# Altium PCB PCB_Dres.PcbDoc
Units mm, origin at the board's own origin, x right, y up, seen from the top; angles counter-clockwise.
Board outline 44.1 x 41.7 mm, 2 copper layers (Top Layer, Bottom Layer), stack 1.671 mm thick; 26 components, 19 nets, 148 pads, 49 vias.
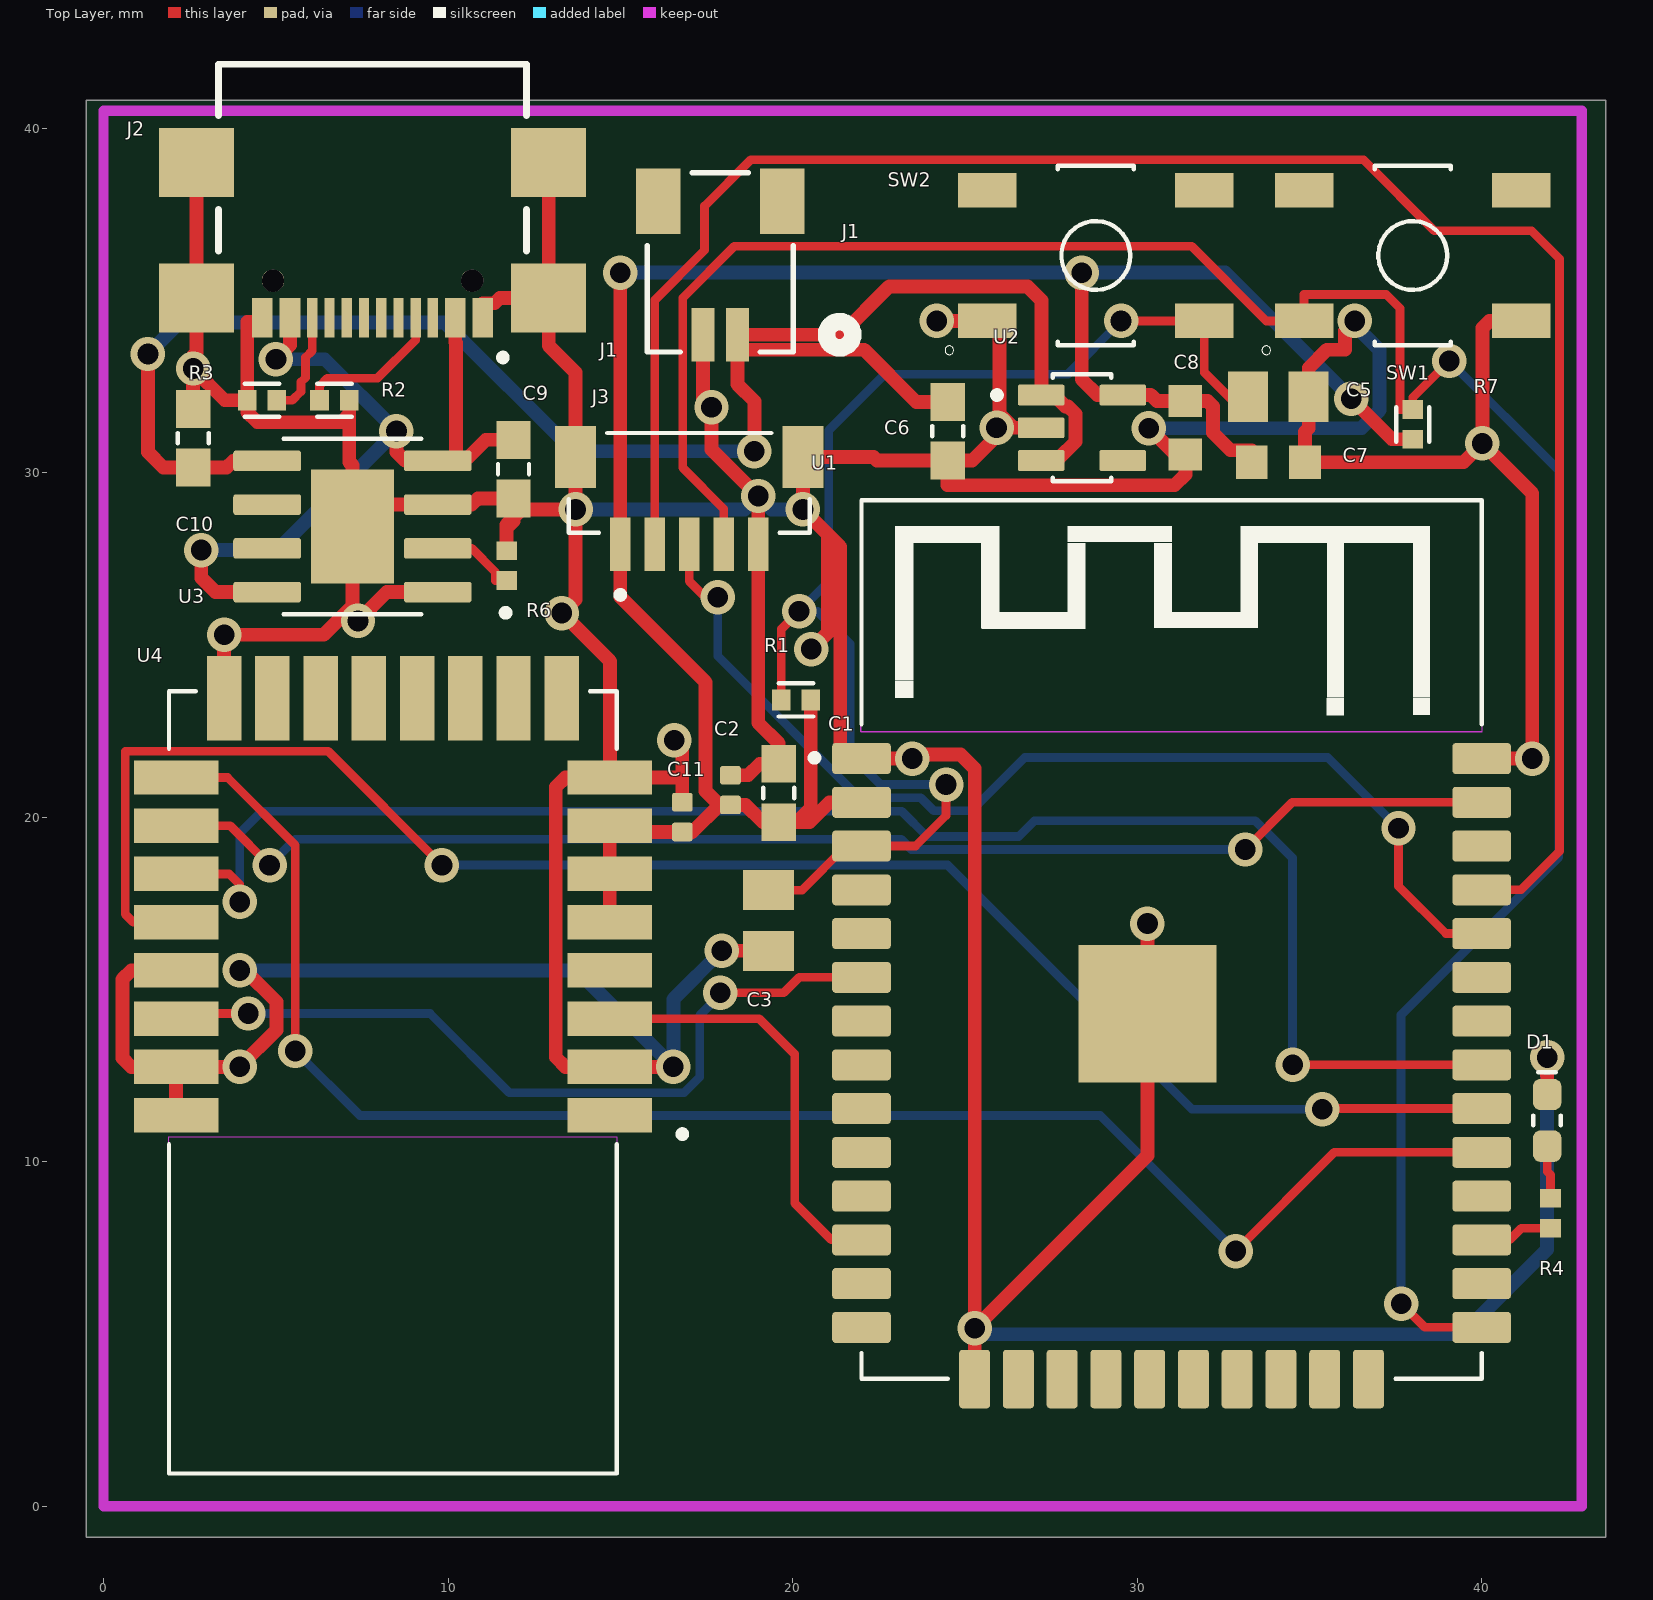
[diagram p0: Top Layer view]
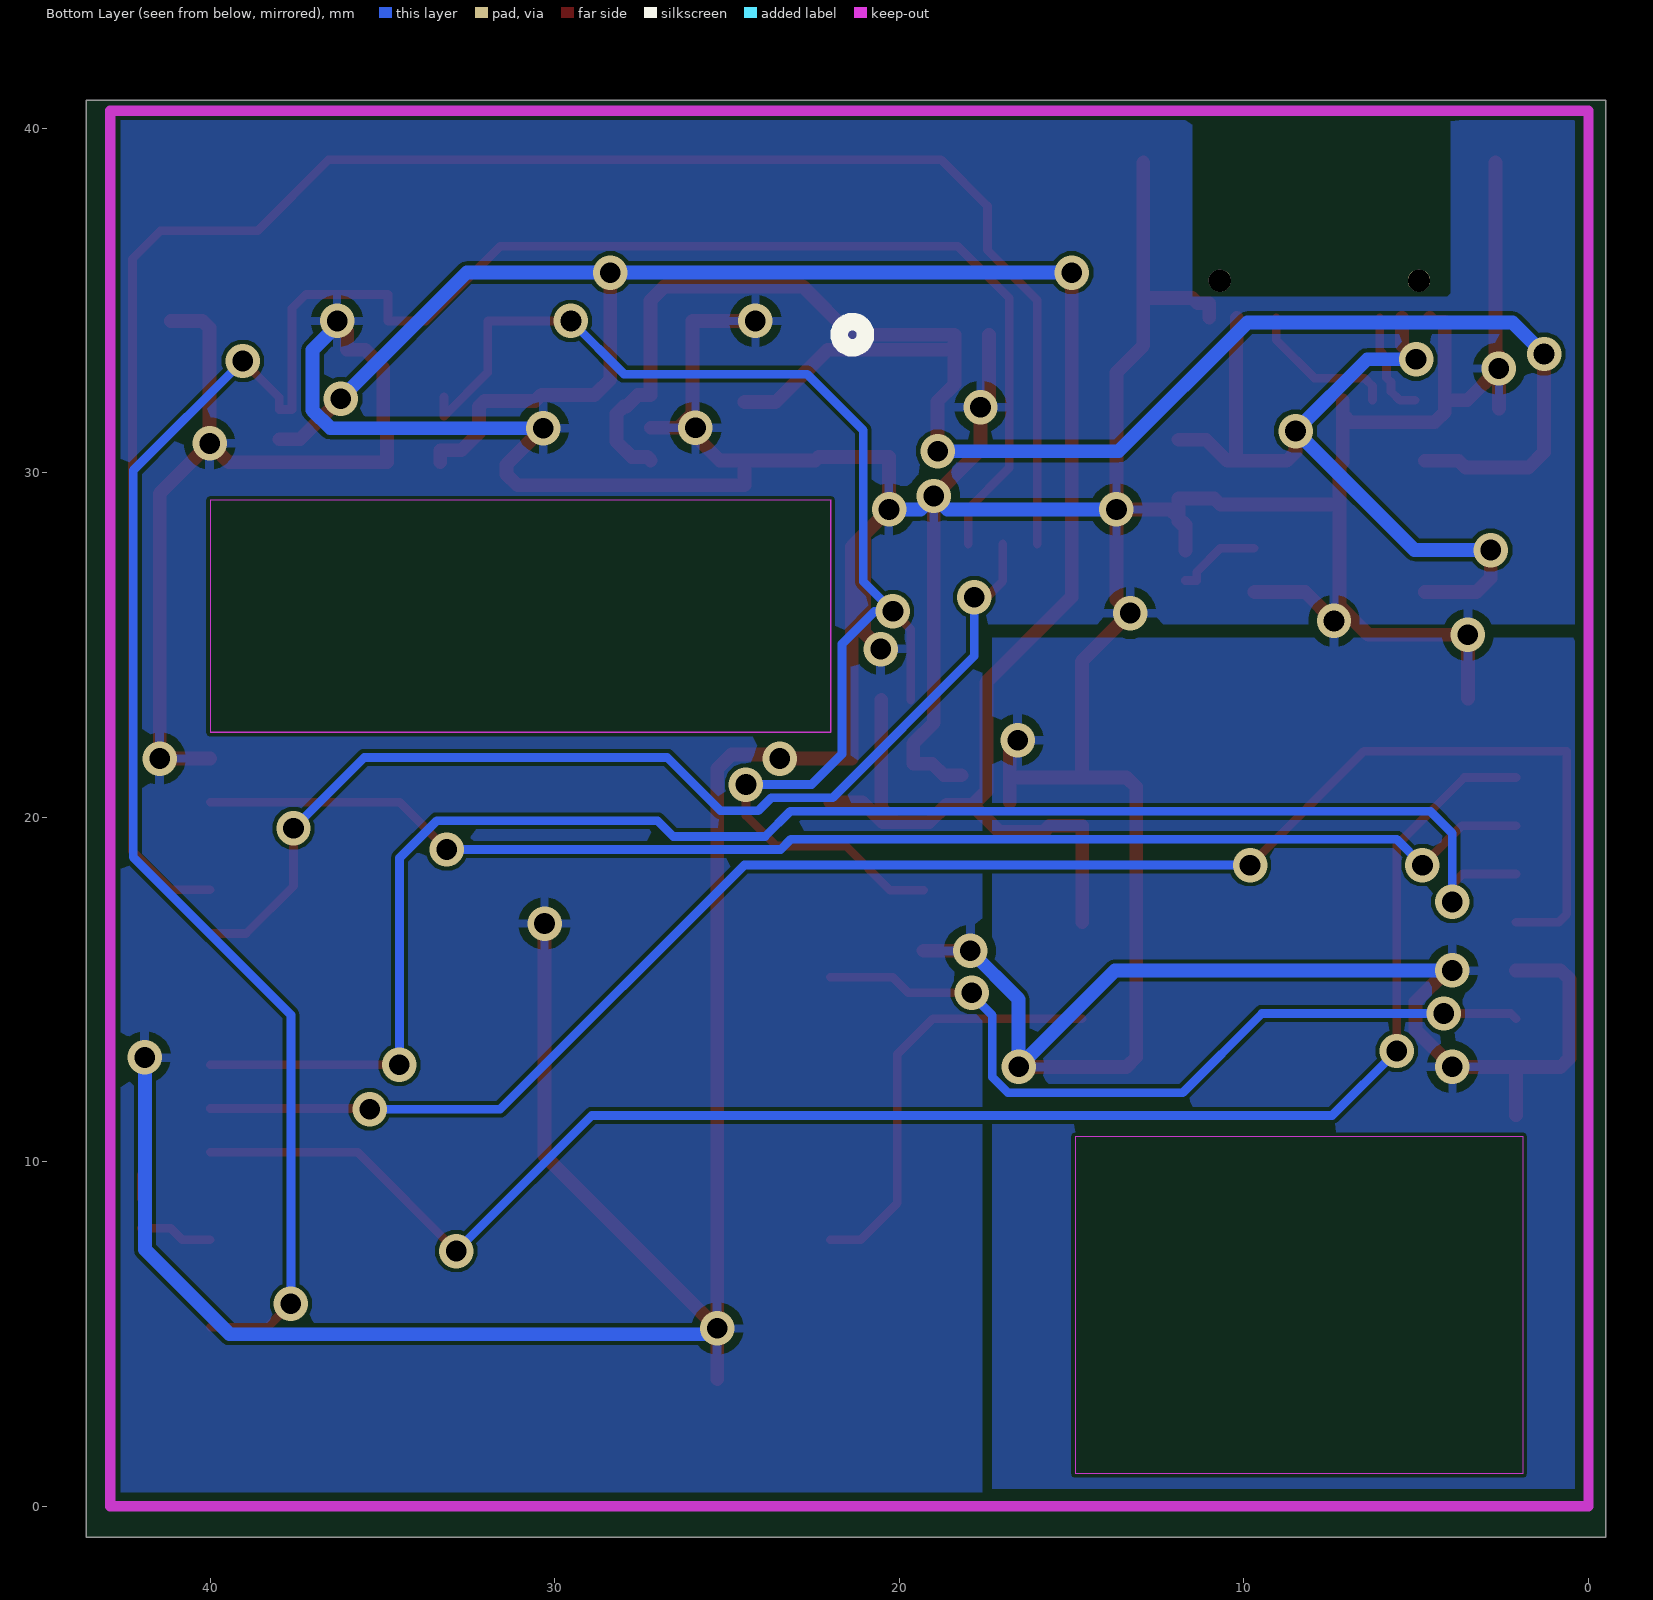
[diagram p1: Bottom Layer view, seen from below]
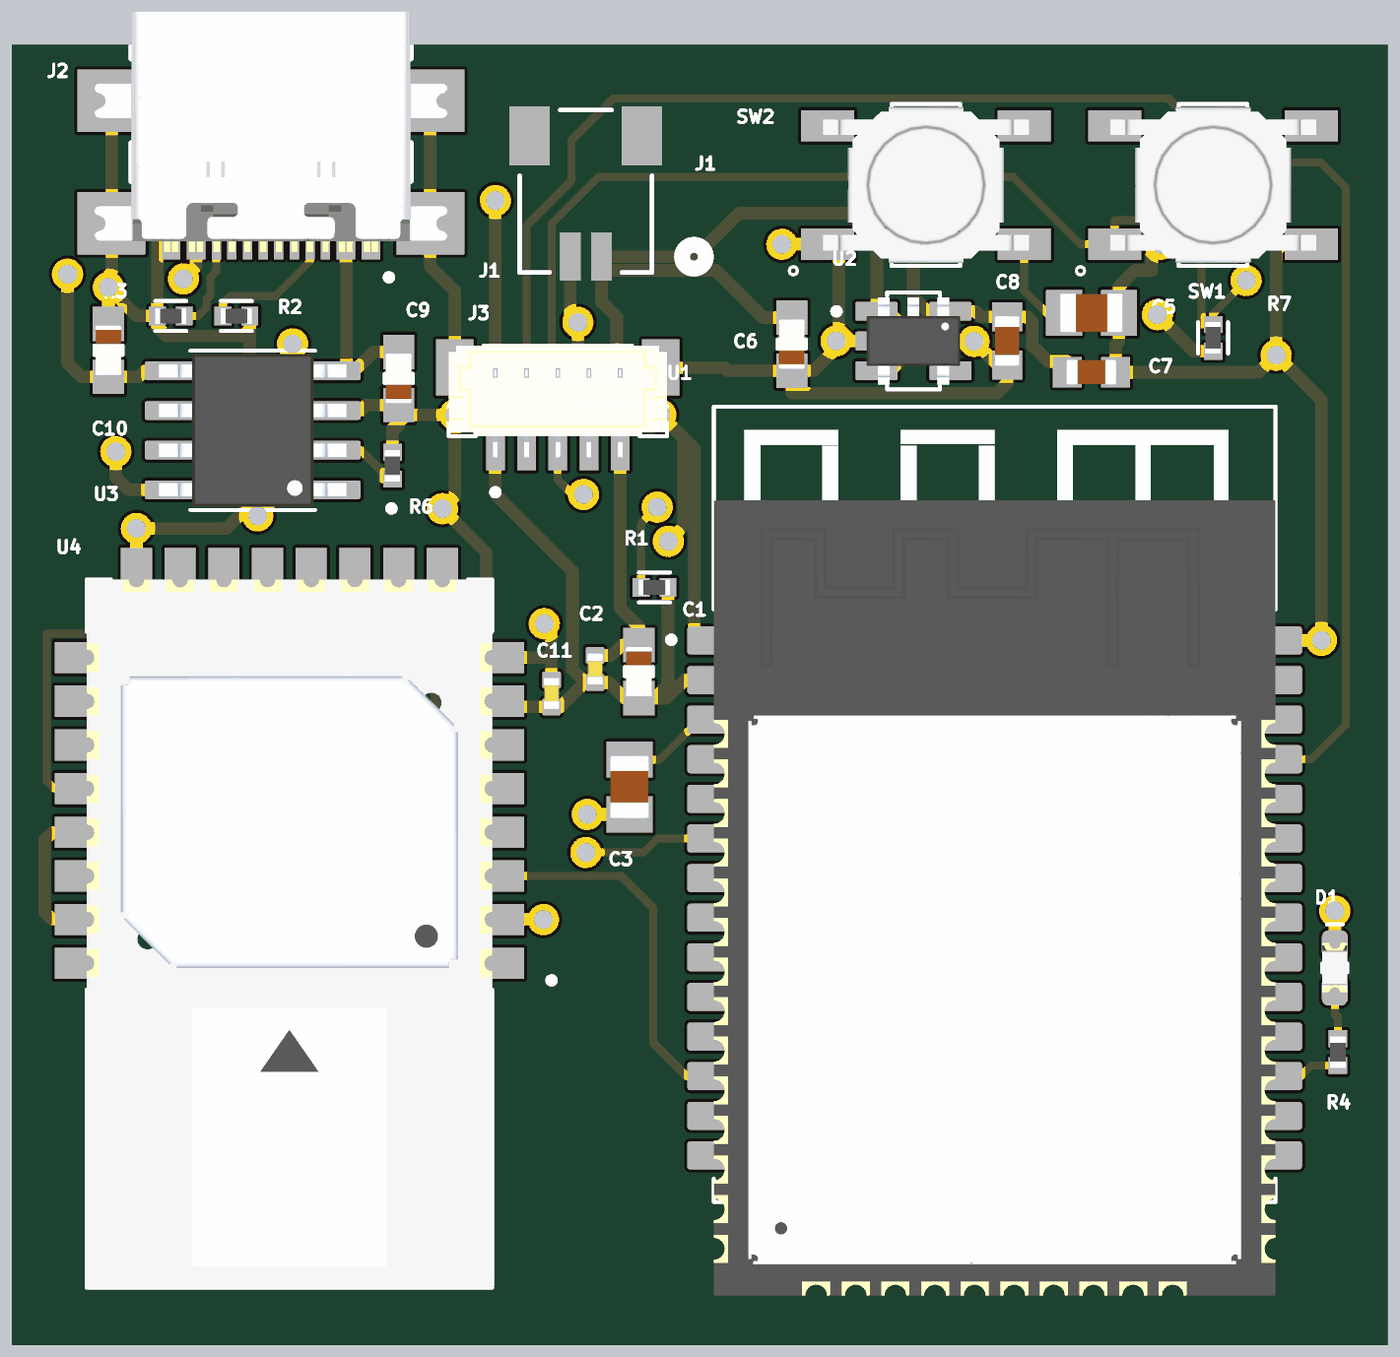
[diagram p2: 3D render of the assembled board from above, using the file's embedded part models]

## Layer stack, top to bottom
Top Solder: solder mask 0.0102, Solder Resist, Dk 3.5
Top Layer: signal copper 0.0356
Dielectric1: core 1.6, FR-4, Dk 4.8
Bottom Layer: signal copper 0.0356
Bottom Solder: solder mask 0.0102, Solder Resist, Dk 3.5

## Board outline
-0.5,-0.9 43.6,-0.9 43.6,40.8 -0.5,40.8

## Design rules (kind name [scope] priority, off if disabled: settings)
BoardOutlineClearance [All] p1: gap=0.12 ignorepadtopadclearanceinfootprint=FALSE except(0: Arc-SplitContinuation Track-SplitContinuation SMDPad-SplitContinuation THPad-SplitContinuation Via-SplitContinuation Fill-SplitContinuation Poly-SplitContinuation Region-SplitContinuation Text-SplitContinuation)
Clearance [All] p1: gap=0.12 ignorepadtopadclearanceinfootprint=FALSE except(0: Arc-Hole Track-Hole SMDPad-Hole THPad-Hole Via-Hole Fill-Hole Poly-Hole Region-Hole Text-Hole)
DiffPairsRouting DiffPair_USB_DATADiffPairsRouting [InDifferentialPairClass('USB_DATA')] p1: maxlimit=0.254 minlimit=0.254 mostfreqgap=0.254 toplayer_minwidth=0.381 toplayer_maxwidth=1.27 toplayer_prefwidth=1.27 bottomlayer_minwidth=0.381 bottomlayer_maxwidth=1.27 bottomlayer_prefwidth=1.27 maxuncoupledlength=12.7
DiffPairsRouting [All] p2: maxlimit=0.254 minlimit=0.254 mostfreqgap=0.254 toplayer_minwidth=0.381 toplayer_maxwidth=0.381 toplayer_prefwidth=0.381 bottomlayer_minwidth=0.381 bottomlayer_maxwidth=0.381 bottomlayer_prefwidth=0.381 maxuncoupledlength=12.7
HoleSize HoleSize_1 [InPadClass('Mounting_Holes')] p1: absolutevalues=TRUE maxlimit=3 minlimit=0.025 maxpercent=80.000 minpercent=20.000
HoleSize Mounting_Holes [All] p2: absolutevalues=TRUE maxlimit=2.54 minlimit=0.025 maxpercent=80.000 minpercent=20.000
MatchedLengths DiffPair_USB_DATAMatchedLengths [InDifferentialPairClass('USB_DATA')] p1: tolerance=3.048 checknetsindiffpair=TRUE checkdiffpairvsdiffpair=FALSE checkxsignals=FALSE checkothers=FALSE
MinimumSolderMaskSliver [All] p1: minsoldermaskwidth=0
PolygonConnect [All] p1: connectstyle=Relief reliefconductorwidth=0.254 reliefentries=4 polygonreliefangle="90 Angle" airgapwidth=0.254
RoomDefinition U_ESP32_Module [InComponentClass('U_ESP32_Module')] p1: confinementstyle=ConfineIn formatcopy=TRUE lockcomponents=FALSE outline 0.092,42.325 0.3,25.5 17.5,25.5 17.5,0.3 42.7,0.3 42.7,42.476
RoomDefinition U_DWM3000 [InComponentClass('U_DWM3000')] p2: confinementstyle=ConfineIn formatcopy=TRUE lockcomponents=FALSE outline 0.3,0.4 17.4,0.4 17.4,25.3 0.3,25.3
RoutingVias [All] p1: holewidth=0.6 width=1 viastyle="Through Hole" minholewidth=0.6 minwidth=1 maxholewidth=0.711 maxwidth=1.27
ShortCircuit ShortCircuit_ADG [InNet('AGND') vs InNet('DGND')] p1 off: allowed=TRUE
ShortCircuit [All] p2: allowed=FALSE
SilkToSolderMaskClearance SilkscreenOverComponentPads [IsPad] p1 off: minsilkscreentomaskgap=0.254 clearancetoexposedcopper=TRUE
SolderMaskExpansion [All] p1: expansion=0.102 istentingtop=FALSE
SupplyNets "Schematic Supply Nets_3" [InNet('+3.3V')] p1: voltage=0.000
SupplyNets "Schematic Supply Nets_1" [InNet('GND')] p2: voltage=0.000
Width Width_Power [InNetClass('Power')] p1: maxlimit=0.6 minlimit=0.3 preferedwidth=0.4 minimp=50.000000 maximp=50.000000 favimp=50.000000
Width [All] p2: maxlimit=0.254 minlimit=0.254 preferedwidth=0.254
25 further rules are at their usual default settings.

## Classes and differential pairs
net class Power: +3.3V GND V_BAT V_USB
component class U_ESP32_Module: C1 C2 C3 C5 C6 C7 C8 C9 C10 D1 J1 J2 J3 R1 R2 R3 R4 R6 R7 SW1 SW2 U1 U2 U3
component class U_DWM3000: C11 U4

## Components (designator, comment, footprint, x,y, rotation, side; value= is the part's Value field where it differs from the comment)
C1 "Cap" CAPC1608X90 19.6,20.7 r270 top value=10uF
C2 "Cap" CAPC1005X55N 18.197,20.785 r270 top value=100nF
C3 "Cap" CAPC2012X94N 19.3,17 r90 top value=0.1uF/50V(10%)
C5 "Cap" CAPC2012X94N 34.1,32.2 r180 top value=0.1uF/50V(10%)
C6 "Cap" CAPC1608X90 24.5,31.2 r90 top value=10uF
C7 "Cap" CAPC1608X87N 34.1,30.3 r180 top value=10nF
C8 "Cap" CAPC1608X87N 31.4,31.3 r90 top value=10nF
C9 "Cap" CAPC1608X90 11.9,30.1 r90 top value=10uF
C10 "Cap" CAPC1608X90 2.6,31 r270 top value=10uF
C11 "Cap" CAPC1005X55N 16.8,20 r270 top value=0.1uF
D1 "597-3326-607F" LEDSC160X80X70L45N 41.9,11.2 r270 top
J1 "SM02B-SRSS-TB (LF)(SN)" CONN_SM02B-SRSS-TB_JST 17.9,36.1 r0 top
J2 "USB4110GFA" GCT_USB4110GFA 7.81,35.57 r180 top
J3 "BM05B-SRSS-TB(LF)(SN)" JST_BM05B-SRSS-TB(LF)(SN) 17,29.7 r0 top
R1 "Res1" RESC1005X40 20.1,23.4 r0 top value="10k (5%)"
R2 "Res1" RESC1005X40 6.7,32.1 r180 top value=5.1k
R3 "Res1" RESC1005X40 4.6,32.1 r180 top value=5.1k
R4 "Res1" RESC1005X40N 42,8.5 r90 top value=220
R6 "Res1" RESC1005X40N 11.7,27.3 r270 top value=2.4k
R7 "Res1" RESC1005X40 38,31.4 r270 top value="10k (5%)"
SW1 "SW-PB" SW_TL3342F160QG 38,36.3 r0 top
SW2 "SW-PB" SW_TL3342F160QG 28.8,36.3 r0 top
U1 "ESP-WROOM-32" MODULE_ESP-WROOM-32 31,13.445 r0 top
U2 "AP2112K-3.3TRG1" SOT95P285X140-5N 28.4,31.3 r0 top
U3 "TP4056" SOP127P600X175-9N 7.225,28.435 r180 top
U4 "DWM3000TR13" XCVR_DWM3000TR13 8.4,12.3 r180 top

## Footprints (in the part's own frame and the unit in brackets; to place one, negate y for a bottom-side part, rotate by r counter-clockwise, add the part's x,y. Pads: shape width x height; smd on the part's side, far side on the other; paste and mask are expansions set on the pad)
CAPC1005X55N [mm]
  rrect25% 0.54x0.6 smd: 1(-0.432,0) 2(0.432,0)
  body extent -0.5,-0.25 0.5,0.25, height 0.55
CAPC1608X87N [mm]
  rect 0.92x0.97 smd: 1(-0.775,0) 2(0.775,0)
  body extent -0.8,-0.4 0.8,0.4, height 0.87
CAPC1608X90 [mm]
  rect 1.1x1 smd: 1(-0.85,0) 2(0.85,0)
  silkscreen extent -0.15,-0.45 0.15,0.45, body extent -0.8,-0.43 0.8,0.43, height 1
CAPC2012X94N [mm]
  rect 1.16x1.47 smd: 1(-0.88,0) 2(0.88,0)
  body extent -1,-0.63 1,0.63, height 0.94
CONN_SM02B-SRSS-TB_JST [mil]
  rect 26x61 smd paste+0 mask+0: 1(19.69,-82.62) 2(-19.68,-82.62)
  rect 51x75 smd paste+0 mask+0: 3(-70.87,69.94) 4(70.87,69.94)
  silkscreen extent -84,-103 151,102
GCT_USB4110GFA [mm]
  rect 0.6x1.15 smd: A1/B12(-3.2,1.075) A4/B9(-2.4,1.075) B1/A12(3.2,1.075) B4/A9(2.4,1.075)
  rect 0.3x1.15 smd: A5(-1.25,1.075) A6(-0.25,1.075) A7(0.25,1.075) A8(1.25,1.075) B5(1.75,1.075) B6(0.75,1.075) B7(-0.75,1.075) B8(-1.75,1.075)
  rect 2.18x2 smd: S1(-5.11,0.5) S2(5.11,0.5) S3(-5.11,-3.43) S4(5.11,-3.43)
  round 0.65 hole 0.65 unplated: ""(-2.89,0) ""(2.89,0)
  silkscreen extent -4.47,-6.28 4.47,2.33, body extent -5.65,-6.28 5.65,1.42, height 3.26
JST_BM05B-SRSS-TB(LF)(SN) [mm]
  rect 0.6x1.55 smd: 1(-2,-1.775) 2(-1,-1.775) 3(0,-1.775) 4(1,-1.775) 5(2,-1.775)
  rect 1.2x1.8 smd: S1(-3.3,0.75) S2(3.3,0.75)
  silkscreen extent -3.5,-3.35 3.5,1.45, body extent -3.5,-2.15 3.5,1.45, height 4.25
LEDSC160X80X70L45N [mm]
  rrect53% 0.91x0.83 smd: A(0.75,0) C(-0.75,0)
  silkscreen extent -1.4,-0.4 0.14,0.4, body extent -0.8,-0.4 0.8,0.4, height 0.7
MODULE_ESP-WROOM-32 [mm]
  rrect22% 1.7x0.9 smd: 1(-9,8.255) 2(-9,6.985) 3(-9,5.715) 4(-9,4.445) 5(-9,3.175) 6(-9,1.905) 7(-9,0.635) 8(-9,-0.635) 9(-9,-1.905) 10(-9,-3.175) 11(-9,-4.445) 12(-9,-5.715) 13(-9,-6.985) 14(-9,-8.255) 25(9,-8.255) 26(9,-6.985) 27(9,-5.715) 28(9,-4.445) 29(9,-3.175) 30(9,-1.905) 31(9,-0.635) 32(9,0.635) 33(9,1.905) 34(9,3.175) 35(9,4.445) 36(9,5.715) 37(9,6.985) 38(9,8.255)
  rect 4x4 smd: 1.1(-0.7,0.845)
  rrect22% 0.9x1.7 smd: 15(-5.715,-9.755) 16(-4.445,-9.755) 17(-3.175,-9.755) 18(-1.905,-9.755) 19(-0.635,-9.755) 20(0.635,-9.755) 21(1.905,-9.755) 22(3.175,-9.755) 23(4.445,-9.755) 24(5.715,-9.755)
  Keep-Out Layer region: 9,9.012 -9.012,9.012 -9.012,15.75 9,15.75
  Keep-Out Layer region: 9,9.026 -9.026,9.026 -9.026,15.75 9,15.75
  silkscreen extent -10.46,-9.75 9,15.75, body extent -9,-12.75 9,12.75, height 3.25
RESC1005X40 [mm]
  rect 0.54x0.6 smd: 1(-0.43,0) 2(0.43,0)
  silkscreen extent -0.5,-0.48 0.5,0.48, body extent -0.5,-0.25 0.5,0.25, height 0.4
RESC1005X40N [mm]
  rect 0.54x0.6 smd: 1(-0.432,0) 2(0.432,0)
  body extent -0.5,-0.25 0.5,0.25, height 0.4
SOP127P600X175-9N [mm]
  rrect25% 1.97x0.6 smd: 1(-2.475,1.905) 2(-2.475,0.635) 3(-2.475,-0.635) 4(-2.475,-1.905) 5(2.475,-1.905) 6(2.475,-0.635) 7(2.475,0.635) 8(2.475,1.905)
  rect 2.413x3.302 smd paste-3: 9(0,0)
  silkscreen extent -4.54,-2.55 2,2.6, body extent -3,-2.45 3,2.45, height 1.75
SOT95P285X140-5N [mm]
  rrect15% 1.35x0.6 smd: 1(-1.185,0.95) 2(-1.185,0) 3(-1.185,-0.95) 4(1.185,-0.95) 5(1.185,0.95)
  silkscreen extent -2.57,-1.55 0.85,1.55, body extent -1.5,-1.4 1.5,1.4, height 1.4
SW_TL3342F160QG [mm]
  rect 1.7x1 smd paste+0 mask+0.102: 1(-3.15,-1.9) 2(3.15,-1.9) 3(-3.15,1.9) 4(3.15,1.9)
  silkscreen extent -4.38,-2.88 1.1,2.6, body extent -3.3,-2.5 3.3,2.5, height 1.46
XCVR_DWM3000TR13 [mm]
  rect 2.45x1 smd: 1(-6.295,0.95) 2(-6.295,-0.45) 3(-6.295,-1.85) 4(-6.295,-3.25) 5(-6.295,-4.65) 6(-6.295,-6.05) 7(-6.295,-7.45) 8(-6.295,-8.85) 17(6.295,-8.85) 18(6.295,-7.45) 19(6.295,-6.05) 20(6.295,-4.65) 21(6.295,-3.25) 22(6.295,-1.85) 23(6.295,-0.45) 24(6.295,0.95)
  rect 1x2.45 smd: 9(-4.9,-11.145) 10(-3.5,-11.145) 11(-2.1,-11.145) 12(-0.7,-11.145) 13(0.7,-11.145) 14(2.1,-11.145) 15(3.5,-11.145) 16(4.9,-11.145)
  Keep-Out Layer region: 6.5,1.575 -6.5,1.575 -6.5,11.35 6.5,11.35
  Keep-Out Layer region: 6.5,1.575 -6.5,1.575 -6.5,11.35 6.5,11.35
  silkscreen extent -8.5,-11.35 6.5,11.35, body extent -6.5,-11.35 6.5,11.35, height 2.89

## Part data
C1 C2 C3 C5 C6 C7 C8 C9 C10 C11: "Capacitor", LatestRevisionDate=17-Jul-2002, LatestRevisionNote="Re-released for DXP Platform.", PackageDescription="Radial Cap, Thru-Hole; 2 Leads; 0.3 in Pin Spacing", PackageReference=RAD-0.3, Published=8-Jun-2000, Publisher="Altium Limited"
D1: "SMD LED 0603 INGAN GREEN", Package="0603 Dialight", Check_prices=https://www.snapeda.com/parts/597-3326-607F/Dialight/view-part/?ref=eda, MF=Dialight, MP=597-3326-607F, SnapEDA_Link=https://www.snapeda.com/parts/597-3326-607F/Dialight/view-part/?ref=snap
J1: library part "SM02B-SRSS-TB LFSN", "Description", Manufacturer_Name=JST, Copyright="Copyright (C) 2026 Ultra Librarian. All rights reserved.", Manufacturer_Part_Number="SM02B-SRSS-TB (LF)(SN)", RefDes=RefDes, Type=Type
J2: "USB-C (USB TYPE-C) USB 2.0 Receptacle Connector 24 (16+8 Dummy) Position Surface Mount, Right Angle", Package=None, Check_prices=https://www.snapeda.com/parts/USB4110GFA/Global+Connector+Technology/view-part/?ref=eda, MF="Global Connector Technology", MP=USB4110GFA, SnapEDA_Link=https://www.snapeda.com/parts/USB4110GFA/Global+Connector+Technology/view-part/?ref=snap
J3: Package=None, Availability=Unavailable, MP=BM05B-SRSS-TB(LF)(SN), Price=None
R1 R2 R3 R4 R6 R7: "Resistor", LatestRevisionDate=17-Jul-2002, LatestRevisionNote="Re-released for DXP Platform.", PackageDescription="Axial Device, Thru-Hole; 2 Leads; 0.3 in Pin Spacing", PackageReference=AXIAL-0.3, Published=8-Jun-2000, Publisher="Altium Limited"
SW1 SW2: "Switch", LatestRevisionDate=17-Jul-2002, LatestRevisionNote="Re-released for DXP Platform.", PackageDescription="Switch; 2 Leads", PackageReference=SPST-2, Published=24-Mar-1999, Publisher="Altium Limited"
U1: "Transceptor serie ESP-WROOM-32; Placa de evaluaciÃ³n 802.11 b/g/n (Wi-Fi, WiFi, WLAN), BluetoothÂ® Smart 4.x de bajo consumo (BLE)", Package="Module Espressif Systems", Check_prices=https://www.snapeda.com/parts/ESP-WROOM-32/Espressif+Systems/view-part/?ref=eda, MF="Espressif Systems", MP=ESP-WROOM-32, SnapEDA_Link=https://www.snapeda.com/parts/ESP-WROOM-32/Espressif+Systems/view-part/?ref=snap
U2: "Linear Voltage Regulator IC Positive Fixed 1 Output 600mA SOT-25", Package="SOT-753 Diodes Inc.", Availability="In Stock", Check_prices=https://www.snapeda.com/parts/AP2112K-3.3TRG1/Diodes+Inc./view-part/?ref=eda, MF="Diodes Inc.", MP=AP2112K-3.3TRG1, Price=None, Purchase-URL=https://pricing.snapeda.com/search/part/AP2112K-3.3TRG1/?ref=eda, SnapEDA_Link=https://www.snapeda.com/parts/AP2112K-3.3TRG1/Diodes+Inc./view-part/?ref=snap
U3: "Complete single cell Li-Ion battery with a constant current / constant voltage linear charger", Package=Package, Availability="Not in stock", Check_prices=https://www.snapeda.com/parts/TP4056/NanJing+Top+Power+ASIC+Corp./view-part/?ref=eda, MF="NanJing Top Power ASIC Corp.", MP=TP4056, Price=None, SnapEDA_Link=https://www.snapeda.com/parts/TP4056/NanJing+Top+Power+ASIC+Corp./view-part/?ref=snap
U4: "802.15.4, Bluetooth, Cellular UWB, ZigbeeÂ® Transceiver Module 6.25GHz ~ 8.25GHz Integrated, Ceramic Patch Surface Mount", Package=None, Check_prices=https://www.snapeda.com/parts/DWM3000TR13/Qorvo/view-part/?ref=eda, MF=Qorvo, MP=DWM3000TR13, SnapEDA_Link=https://www.snapeda.com/parts/DWM3000TR13/Qorvo/view-part/?ref=snap

## Via types
v1: diameter 1, hole 0.6, Top Layer to Bottom Layer, 49 vias

## Nets (pads, with @x,y where several pads share a name; then routed paths per layer and width w, separated by ;. In a path a pad name is that pad's centre, name@x,y a point inside that pad or via, vN(x,y) a via of type N, cw(c..) or ccw(c..) an arc to the next point about the centre after c; other vN are vias at no path point)
+3.3V: C1.2 C2.2 C7.2 C8.2 C11.2 J3.1 R1.2 R7.2 U1.2 U2.5 U4.5 U4.6 U4.7 | length 66
  Top Layer w0.4: U4.5 U4.6 U4.7 15.64,19.75 15.822,19.568 C11.2 17.088,19.568 17.875,20.353 ; v1(15,35.803) J3.1 15,26.385 17.469,23.916 17.469,20.76 17.875,20.353 ; R1.2 20.53,20.27 20.11,19.85 ; U1.2 21.071,20.43 20.491,19.85 20.11,19.85 ; v1(28.391,35.803) 28.391,32.707 28.848,32.25 U2.5 30.397,32.25 30.572,32.075 C8.2 32.043,32.075 32.201,31.917 32.201,31.155 32.709,30.647 33.325,30.647 C7.2 ; v1(36.214,32.145) 37.389,30.97 R7.2 ; 17.875,20.353 C2.2 18.637,20.353 19.14,19.85 C1.2 20.11,19.85
  Bottom Layer w0.4: v1(15,35.803) v1(28.391,35.803) 32.556,35.803 v1(36.214,32.145)
EN: C3.2 C5.2 R1.1 SW2.2 U1.3 | length 39.6
  Top Layer w0.254: C3.2 20.272,17.88 21.552,19.16 U1.3 23.565,19.16 24.454,20.049 v1(24.454,20.944) ; R1.1 19.67,25.457 v1(20.187,25.973) ; v1(29.534,34.4) SW2.2 31.95,32.907 33.22,31.637 C5.2
  Bottom Layer w0.254: v1(24.454,20.944) 22.555,20.944 21.663,21.835 21.663,25.03 20.72,25.973 v1(20.187,25.973) 21.05,26.837 21.05,31.231 22.676,32.857 27.99,32.857 v1(29.534,34.4)
GND: C1.1 C2.1 C3.1 C5.1 C6.1 C7.1 C8.1 C9.1 C10.1 C11.1 D1.C J1.2 J2.A1/B12 J2.B1/A12 J2.S1 J2.S2 J2.S3 J2.S4 J3.5 J3.S1 J3.S2 R2.1 R3.2 R6.1 SW1.2 SW2.1 U1.1 U1.1.1 U1.15 U1.38 U2.2 U3.1 U3.3 U3.9 U4.2 U4.8 U4.16 U4.21 U4.23 U4.24 | length 261.9
  Top Layer w0.4: U4.24 U4.23 ; U4.21 0.806,15.55 0.552,15.296 0.552,13.004 0.806,12.75 U4.23 ; C10.1 v1(2.6,33.02) ; J2.S4 J2.S2 2.7,33.49 2.6,33.39 v1(2.6,33.02) ; U4.16 v1(3.5,25.29) 6.389,25.29 v1@7.225,26.126 ; v1(3.95,15.55) 4.11,15.55 5.02,14.64 5.02,13.825 3.95,12.755 v1(3.95,12.75) U4.23 ; J2.B1/A12 4.61,34.381 4.17,34.381 R3.2 ; R2.1 7.13,31.687 ; U3.1 8.222,26.53 v1(7.386,25.694) v1@7.225,26.126 ; J2.A1/B12 11.01,34.914 11.347,34.914 11.503,35.07 J2.S1 ; R6.1 11.7,28.386 ; J2.S3 J2.S1 ; v1(16.54,12.75) U4.2 13.405,12.75 13.125,13.029 13.125,20.871 13.405,21.15 U4.8 U4.8@14.7,21.15 ; v1(16.568,22.233) 16.8,22.001 16.8,21.15 ; C11.1 16.8,21.15 ; J1.2 17.4,32.144 v1(17.647,31.897) 17.647,30.673 v1(19,29.32) J3.5 19,22.74 19.6,22.14 C1.1 19.046,21.55 18.713,21.217 C2.1 ; v1(17.945,16.12) C3.1 ; v1(20.542,24.877) 21.025,25.36 21.025,28.205 ; v1(24.18,34.4) SW2.1 26.003,34.4 26.003,31.706 v1@26.41,31.3 ; U1.15 v1(25.285,5.16) ; U2.2 v1@26.41,31.3 ; v1(30.3,16.91) U1.1.1 30.3,10.175 v1(25.285,5.16) ; v1(30.34,31.289) 31.4,30.229 31.4,29.948 31.083,29.631 24.5,29.631 C6.1 ; v1(36.32,34.4) 36.036,34.116 36.036,33.568 35.513,33.568 34.98,33.034 C5.1 34.98,31.285 34.875,31.18 C7.1 39.475,30.3 v1(40.02,30.845) ; U1.38 v1(41.47,21.7) 41.47,29.395 v1(40.02,30.845) ; SW1.2 40.227,34.4 40.02,34.193 v1(40.02,30.845) ; D1.C 41.904,11.95 41.904,12.511 41.9,12.515 v1(41.9,13.025) ; v1(2.6,33.02) 3.52,32.1 R3.2 ; R3.2 4.17,31.754 4.464,31.46 6.902,31.46 7.13,31.687 ; 7.13,31.687 7.13,30.31 7.225,30.215 U3.9@7.225,29.07 ; v1@7.225,26.126 U3.9 U3.9@7.225,29.07 ; U3.9@7.225,29.07 U3.3 10.687,29.07 10.867,29.25 C9.1 11.9,28.688 ; 11.7,28.386 11.7,28.488 11.9,28.688 ; 11.7,28.386 11.9,28.586 11.9,28.688 ; 11.9,28.688 12.142,28.93 v1(13.7,28.93) ; J2.S1 12.92,33.687 13.7,32.907 J3.S1 v1(13.7,28.93) ; v1(13.7,28.93) 13.7,26.32 v1(13.303,25.923) 14.7,24.526 U4.8@14.7,21.15 ; U4.8@14.7,21.15 16.8,21.15 ; 21.025,28.205 21.38,27.85 21.38,21.7 U1.1 v1(23.47,21.7) 23.585,21.815 24.878,21.815 25.285,21.408 v1(25.285,5.16) ; 21.025,28.205 v1(20.3,28.93) J3.S2 22.346,30.45 22.446,30.35 C6.1 ; C6.1 25.216,30.35 25.92,31.054 v1(25.92,31.3) v1@26.41,31.3
  Bottom Layer w0.4: v1(3.95,15.55) 13.74,15.55 v1(16.54,12.75) 16.54,14.715 v1(17.945,16.12) ; v1(13.7,28.93) 18.61,28.93 v1(19,29.32) 19.39,28.93 v1(20.3,28.93) ; v1(25.285,5.16) 25.452,4.993 39.44,4.993 41.9,7.453 v1(41.9,13.025) ; v1(30.34,31.289) 36.517,31.289 37.034,31.806 37.034,33.558 36.32,34.272 v1(36.32,34.4)
IO0: J3.4 R7.1 SW1.1 U1.25 | length 69.3
  Top Layer w0.254: J3.4 18,28.945 16.808,30.137 16.808,35.066 18.308,36.566 31.584,36.566 33.75,34.4 SW1.1@34.842,34.4 ; SW1.1 SW1.1@34.842,34.4 ; v1(37.662,5.876) 38.348,5.19 U1.25 ; v1(39.059,33.238) 38,32.179 R7.1 37.628,31.83 37.628,34.77 37.23,35.168 34.842,35.168 SW1.1@34.842,34.4
  Bottom Layer w0.254: v1(37.662,5.876) 37.662,14.264 42.234,18.836 42.234,30.063 v1(39.059,33.238)
NetD1_A: D1.A R4.2 | length 1.6
  Top Layer w0.254: D1.A 41.9,9.716 42,9.616 R4.2
NetJ2_A5: J2.A5 R2.2 | length 4.4
  Top Layer w0.254: R2.2 6.27,32.511 6.496,32.737 7.949,32.737 9.06,33.847 J2.A5
NetJ2_B5: J2.B5 R3.1 | length 3.1
  Top Layer w0.254: R3.1 5.48,32.1 5.734,32.354 5.734,32.628 5.861,32.755 5.861,33.339 6.06,33.538 J2.B5
NetR4_1: R4.1 U1.27 | length 2.1
  Top Layer w0.254: U1.27 40.811,7.73 41.149,8.068 R4.1
NetR6_2: R6.2 U3.2 | length 2.5
  Top Layer w0.254: U3.2 10.689,27.8 11.373,27.116 11.373,26.868 R6.2
NetU1_6: U1.6 U4.22 | length 23.4
  Top Layer w0.254: U4.22 2.255,14.3 v1(4.2,14.3) ; v1(17.9,14.9) 19.744,14.9 20.194,15.35 U1.6
  Bottom Layer w0.254: v1(4.2,14.3) 9.477,14.3 11.774,12.003 16.849,12.003 17.303,12.457 17.303,14.251 17.9,14.847 v1(17.9,14.9)
NetU1_12: U1.12 U4.3 | length 12.5
  Top Layer w0.254: U4.3 19.03,14.15 20.06,13.121 20.06,8.797 21.126,7.73 U1.12
NetU1_29: U1.29 U4.17 | length 48.3
  Top Layer w0.254: U4.17 3.6,21.15 5.567,19.184 v1(5.567,13.212) ; v1(32.861,7.406) 35.725,10.27 U1.29
  Bottom Layer w0.254: v1(5.567,13.212) 7.436,11.343 28.924,11.343 v1(32.861,7.406)
NetU1_30: U1.30 U4.20 | length 50
  Top Layer w0.254: U4.20 0.863,16.95 0.629,17.185 0.629,21.909 6.521,21.909 v1(9.823,18.607) ; v1(35.376,11.521) 35.395,11.54 U1.30
  Bottom Layer w0.254: v1(9.823,18.607) 24.505,18.607 31.591,11.521 v1(35.376,11.521)
NetU1_31: U1.31 U4.19 | length 47.7
  Top Layer w0.254: U4.19 3.651,18.35 3.956,18.045 v1(3.956,17.537) ; v1(34.512,12.81) U1.31
  Bottom Layer w0.254: v1(3.956,17.537) 3.956,19.534 4.589,20.167 23.167,20.167 23.899,19.435 26.56,19.435 27.021,19.896 33.427,19.896 34.512,18.81 v1(34.512,12.81)
NetU1_37: U1.37 U4.18 | length 39.4
  Top Layer w0.254: U4.18 3.677,19.75 v1(4.82,18.607) ; v1(33.136,19.06) 34.506,20.43 U1.37
  Bottom Layer w0.254: v1(4.82,18.607) 5.567,19.354 23.151,19.354 23.445,19.06 v1(33.136,19.06)
RXD0: J3.3 U1.34 | length 31.6
  Top Layer w0.254: J3.3 17,26.848 17.469,26.38 v1(17.824,26.38) ; v1(37.586,19.674) 37.586,17.998 38.963,16.62 U1.34
  Bottom Layer w0.254: v1(17.824,26.38) 17.824,24.678 21.939,20.563 23.717,20.563 24.098,20.182 25.19,20.182 26.74,21.731 35.528,21.731 v1(37.586,19.674)
TXD0: J3.2 U1.35 | length 56.9
  Top Layer w0.254: J3.2 16,35.006 17.443,36.449 17.443,37.733 18.79,39.08 36.57,39.08 38.627,37.022 41.446,37.022 42.259,36.209 42.259,19.008 41.142,17.89 U1.35
V_BAT: C6.2 C10.2 J1.1 U2.1 U2.3 U3.5 | length 52
  Top Layer w0.4: v1(1.289,33.441) 1.289,30.596 1.735,30.15 C10.2 3.575,30.15 3.765,30.34 U3.5 ; J1.1 J1.1@18.4,34 ; v1(18.891,30.621) 18.891,32.069 18.4,32.56 J1.1@18.4,33.568 ; C6.2 23.59,32.05 22.072,33.568 J1.1@18.4,33.568 ; U2.3 27.315,30.45 27.766,30.45 28.21,30.894 28.21,31.706 27.996,31.92 27.92,31.92 27.59,32.25 U2.1 27.222,32.25 27.222,34.99 26.816,35.397 22.803,35.397 21.406,34 J1.1@18.4,34 ; J1.1@18.4,33.568 J1.1@18.4,34
  Bottom Layer w0.4: v1(1.289,33.441) 2.203,34.355 9.9,34.355 13.633,30.621 v1(18.891,30.621)
V_USB: C9.2 J2.A4/B9 J2.B4/A9 U3.4 U3.8 | length 24.3
  Top Layer w0.4: v1(2.838,27.751) 2.838,26.936 3.245,26.53 U3.8 ; v1(5.004,33.288) 5.41,33.695 J2.B4/A9 ; v1(8.503,31.206) 8.503,30.594 8.757,30.34 U3.4 U3.4@10.23,30.34 ; J2.A4/B9 10.21,33.791 10.23,33.771 U3.4@10.23,30.34 ; C9.2 11.094,30.95 10.484,30.34 U3.4@10.23,30.34
  Bottom Layer w0.4: v1(2.838,27.751) 5.048,27.751 v1(8.503,31.206) 6.42,33.288 v1(5.004,33.288)
pads on no net: J1.3 J1.4 J2. J2.A6 J2.A7 J2.A8 J2.B6 J2.B7 J2.B8 SW1.3 SW1.4 SW2.3 SW2.4 U1.4 U1.5 U1.7 U1.8 U1.9 U1.10 U1.11 U1.13 U1.14 U1.16 U1.17 U1.18 U1.19 U1.20 U1.21 U1.22 U1.23 U1.24 U1.26 U1.28 U1.32 U1.33 U1.36 U2.4 U3.6 U3.7 U4.1 U4.4 U4.9 U4.10 U4.11 U4.12 U4.13 U4.14 U4.15

## Polygon pours and split planes (outlines as drawn)
GND on Bottom Layer "GND_L02_P001" (solid, pour order 1): 0.3,25.2 0.4,25.1 0.4,0.5 17.3,0.5 17.3,25.2
GND on Bottom Layer "GND_L02_P000" (solid, pour order 0): 0.3,40.3 0.4,40.2 0.4,25.6 17.6,25.6 17.6,0.4 42.6,0.4 42.6,40.3

## Keep-outs
Keep-Out Layer:
  lines w0.3: 0,0 42.9,0 42.9,40.5 0,40.5 0,0

## Other copper
Bottom Layer:
  pour cut-out: 4,40.2 4,35.2 4.1,35.1 11.5,35.1 11.5,40.1

## Dimensions
0,0 to 42.9,0 on Mechanical 1
0,40.5 to 0,0 on Mechanical 1